# Altium PCB power.PcbDoc
Units mil, origin at the board's own origin, x right, y up, seen from the top; angles counter-clockwise.
Board outline 1000 x 2460.63 mil, 4 copper layers (Top Layer, GND, POWER, Bottom Layer), stack 23.756 mil thick; 73 components, 33 nets, 289 pads, 253 vias.
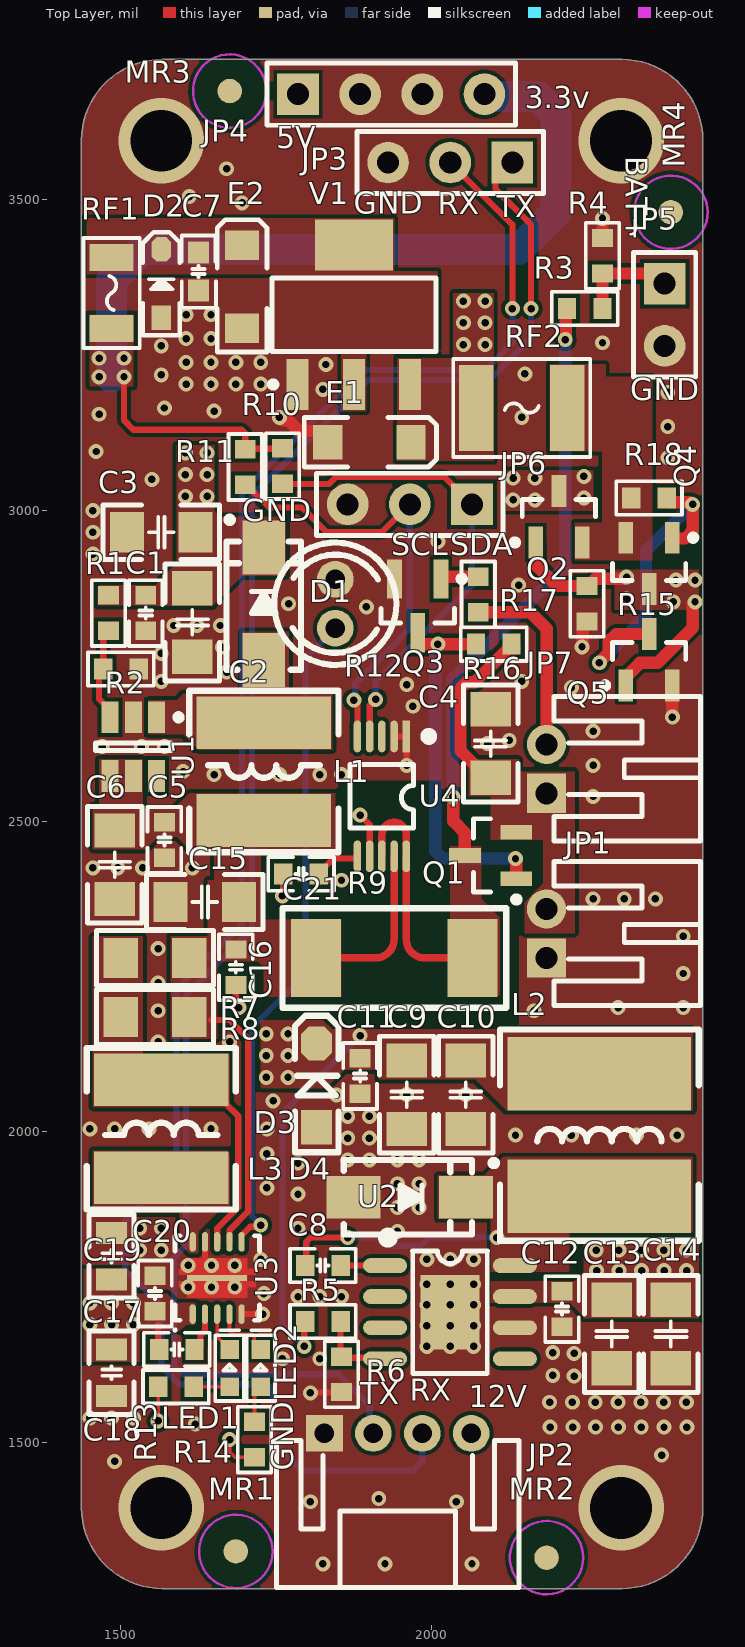
[diagram p0: Top Layer view]
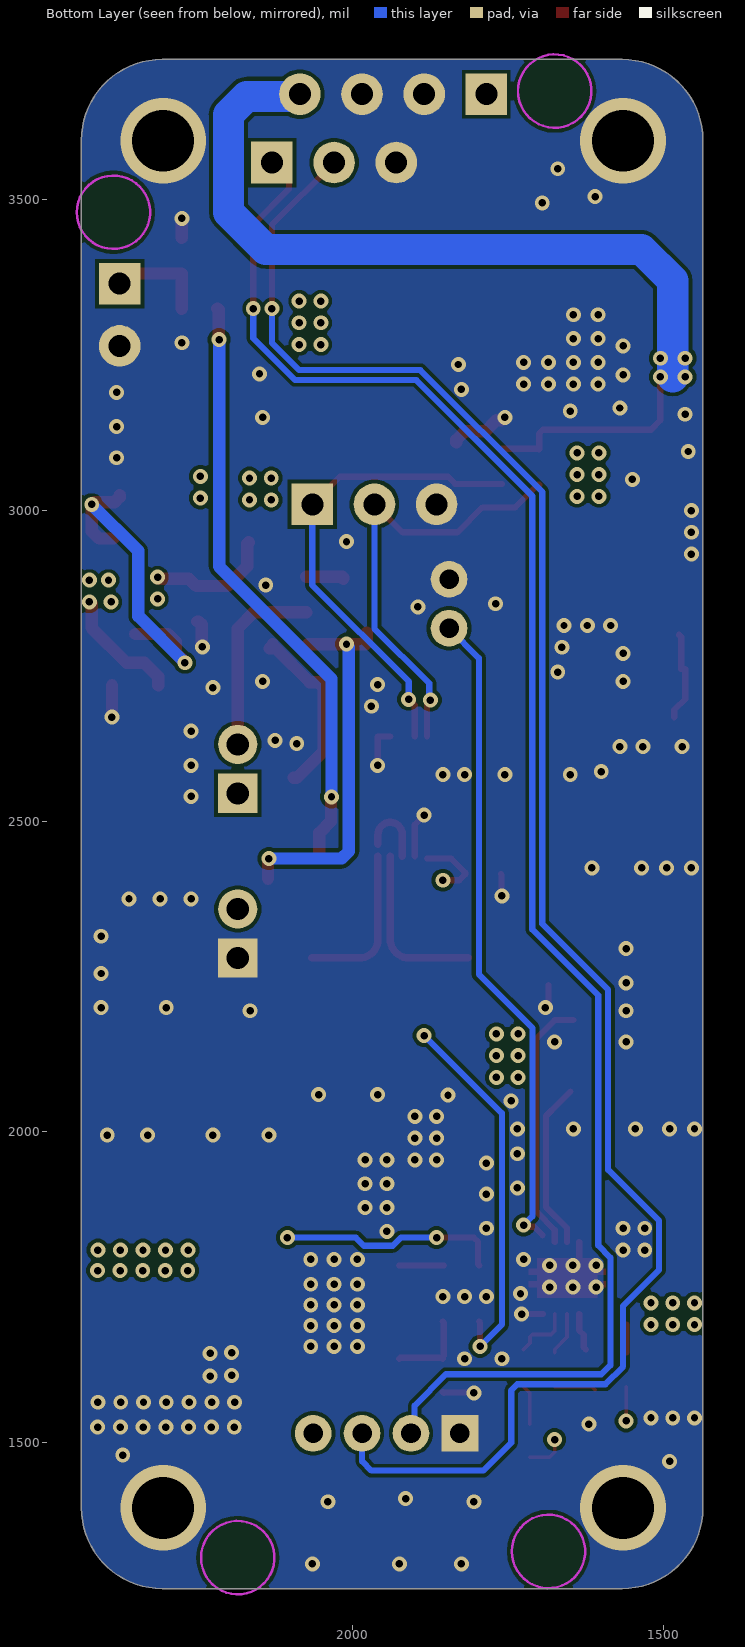
[diagram p1: Bottom Layer view, seen from below]
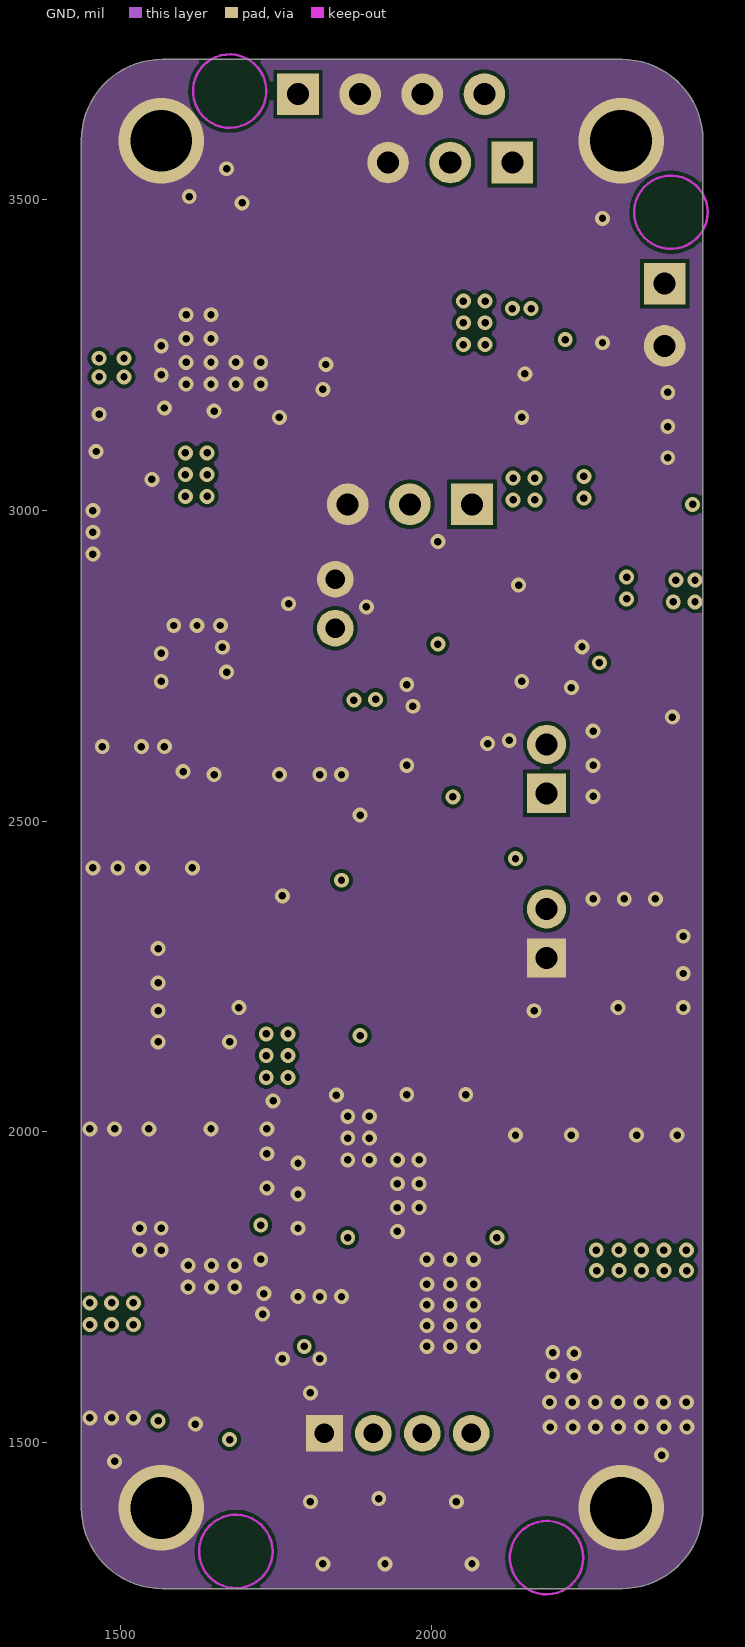
[diagram p2: GND]
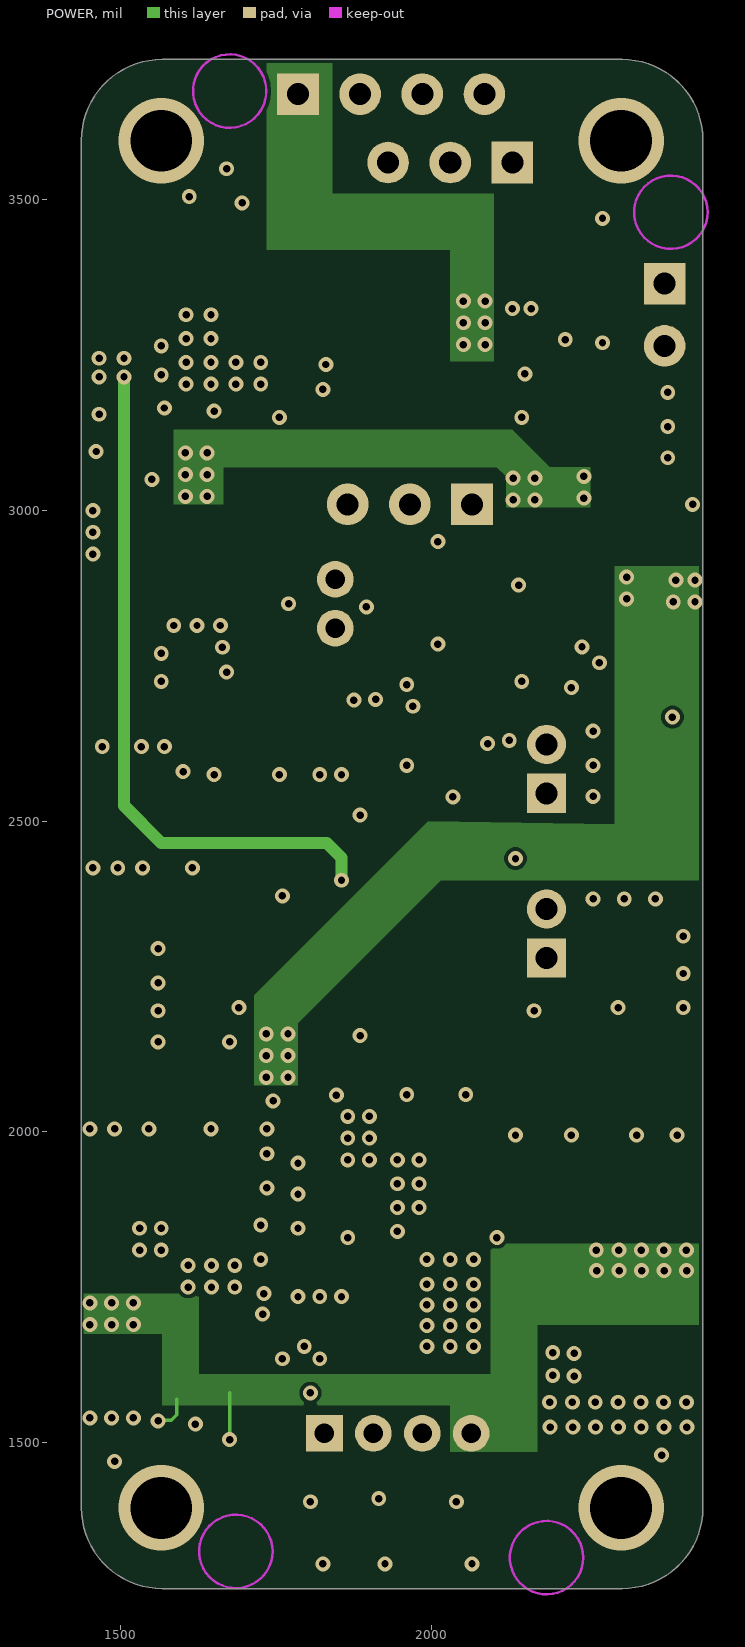
[diagram p3: POWER]

## Layer stack, top to bottom
Top Solder: solder mask 0.4, Solder Resist, Dk 3.5
Top Layer: signal copper 1.4
Dielectric 2: prepreg 2.8, PP-006, Dk 4.1
GND: signal copper 1.378
Dielectric 1: dielectric 12.6, FR-4, Dk 4.8
POWER: signal copper 1.378
Dielectric 3: prepreg 2.8, PP-006, Dk 4.1
Bottom Layer: signal copper 1.4
Bottom Solder: solder mask 0.4, Solder Resist, Dk 3.5

## Board outline
1436.53,1395.17 ccw(c1566.45,1395.17) 1566.45,1265.25 2306.61,1265.25 ccw(c2306.61,1395.17) 2436.53,1395.17 2436.53,3595.96 ccw(c2306.61,3595.96) 2306.61,3725.88 1566.45,3725.88 ccw(c1566.45,3595.96) 1436.53,3595.96

## Design rules (kind name [scope] priority, off if disabled: settings)
AcuteAngle [All] p1: minimum=4.50000000000000E+0001 checktracksonly=FALSE
BoardOutlineClearance [All] p1: gap=0 ignorepadtopadclearanceinfootprint=FALSE
Clearance [All] p1: gap=6 ignorepadtopadclearanceinfootprint=FALSE
DiffPairsRouting [All] p1: maxlimit=10 minlimit=6 mostfreqgap=10 toplayer_minwidth=6 toplayer_maxwidth=15 toplayer_prefwidth=10 midlayer1_minwidth=6 midlayer1_maxwidth=15 midlayer1_prefwidth=10 midlayer2_minwidth=6 midlayer2_maxwidth=15 midlayer2_prefwidth=10 bottomlayer_minwidth=6 bottomlayer_maxwidth=15 bottomlayer_prefwidth=10 maxuncoupledlength=500
Length [All] p1: maxlimit=100000 minlimit=0
MatchedLengths DiffPair_MatchedLengths [InDifferentialPair ('D')] p1: tolerance=5 checknetsindiffpair=FALSE checkdiffpairvsdiffpair=TRUE checkxsignals=TRUE checkothers=TRUE
MinimumAnnularRing [All] p1: minimumring=4
MinimumSolderMaskSliver [All] p1: minsoldermaskwidth=3.2
ParallelSegment [All] p1: limit=10000 gap=10
PlaneClearance [All] p1: clearance=10
PlaneConnect [All] p1: planeconnectstyle=Direct reliefexpansion=20 reliefentries=4 reliefconductorwidth=10 reliefairgap=10
PolygonConnect [All] p1: connectstyle=Direct reliefconductorwidth=10 reliefentries=4 polygonreliefangle="90 Angle" airgapwidth=10
RoutingVias [All] p1: holewidth=12 width=20 viastyle="Through Hole" minholewidth=6 minwidth=10 maxholewidth=100 maxwidth=100
SilkToSilkClearance [All] p1: silktosilkclearance=0
SilkToSolderMaskClearance [IsPad] p1: minsilkscreentomaskgap=0 clearancetoexposedcopper=TRUE
SolderMaskExpansion [All] p1: expansion=0 istentingtop=FALSE
StubLength [All] p1: limit=1000
UnRoutedNet [All] p1: checkbadconnections=TRUE
ViasUnderSMD [All] p1: allowed=TRUE
Width POWER [InNetClass('PWR')] p1: maxlimit=200 minlimit=6 preferedwidth=30
Width singal [All] p2: maxlimit=32 minlimit=4 preferedwidth=10
23 further rules are at their usual default settings.

## Classes and differential pairs
net class PWR: VCC3_3 VCC3_6 VCC5 VCC5_from_bat VCC5_from_vcc12 VCC12
component class power: C1 C2 C3 C4 C5 C6 C7 C8 C9 C10 C11 C12 C13 C14 D1 D2 D3 D4 E1 E2 JP1 JP2 JP3 JP4 JP5 L1 L2 R1 R2 R3 R4 R5 R6 RF1 U1 U2 V1
component class power2: C15 C16 C17 C18 C19 C20 C21 JP6 JP7 L3 LED1 LED2 MR1 MR2 MR3 MR4 Q1 Q2 Q3 Q4 Q5 R7 R8 R9 R10 R11 R12 R13 R14 R15 R16 R17 R18 RF2 U3 U4

## Components (designator, comment, footprint, x,y, rotation, side; value= is the part's Value field where it differs from the comment)
C1 "100nf" C0603_L 1540,2835 r90 top
C2 "100uf/6.3V" C1206_L 1615,2820 r90 top
C3 "100uf/6.3V" C1206_L 1565,2965 r0 top
C4 "100uf/6.3V" C1206_L 2095,2625 r90 top
C5 "100nf" C0603_L 1570,2470 r90 top
C6 "22uf/25V" C1206_L 1490,2430 r90 top
C7 "4.7uf" C0603_M 1625,3384.49 r270 top
C8 "10nf" C0603_L 1825,1785 r180 top
C9 "100uf/6.3v" C1206_L 1960,2060 r90 top
C10 "100uf/6.3v" C1206_L 2055,2060 r90 top
C11 "100nf" C0603_L 1885,2090 r90 top
C12 "100nf" C0603_L 2210,1715 r90 top
C13 "22uf/25v" C1206_L 2290,1674.88 r90 top
C14 "22uf/25v" C1206_L 2385,1674.88 r90 top
C15 "100uf/6.3V" C1206_L 1635,2370 r0 top
C16 "100nf" C0603_L 1685,2265 r90 top
C17 "100nf" C0603_L 1590,1650 r180 top
C18 "22uf/25v" C0805_L 1485,1612.6 r90 top
C19 "22uf/25v" C0805_L 1485,1800 r270 top
C20 "100nf" C0603_L 1555,1740 r90 top
C21 "100nf" C0603_L 1790,2415 r0 top
D1 "B340A-13-F" SMA 1730,2850 r90 top
D2 "UDD32C03L01" SOD-323 1565,3365 r90 top
D3 "SMF5.0A" SOD-123 1815,2075 r90 top
D4 "B340A-13-F" SMA 1965,1895 r0 top
E1 "10uF/10V" C_3216 1900,3110 r180 top
E2 "22uF/10V" C_3216 1695,3360 r270 top
JP1 "HDR-1X2" PH2.0-W-2P 2185,2319.37 r90 top
JP2 "HDR-1X4" PH2.0-W-4P 1945.63,1515 r0 top
JP3 "HDR-1X3" HDR2.54-LI-3P 2030,3560 r180 top
JP4 "HDR-1X4" HDR2.54-LI-4P 1935,3670 r0 top
JP5 "HDR-1X2" HDR2.54-LI-2P 2375,3315 r270 top
JP6 "HDR-1X3" HDR2.54-LI-3P 1965,3010 r180 top
JP7 "HDR-1X2" PH2.0-W-2P 2185,2584.37 r90 top
L1 "4.7uH" CD53 1730,2580 r270 top
L2 "15uH" CD75 2270,1995 r90 top
L3 "4.7uH" CD53 1565,2005 r90 top
LED1 "红色" LED0603_Y 1675,1620 r90 top
LED2 "绿色" LED0603_Y 1725,1620 r90 top
MR1 "MARK1.6" "Mark 1" 1685,1325 r0 top
MR2 "MARK1.6" "Mark 1" 2185,1315 r0 top
MR3 "MARK1.6" "Mark 1" 1675,3675 r0 top
MR4 "MARK1.6" "Mark 1" 2385,3480 r0 top
Q1 "AO3401" SOT23-3N 2095,2445 r90 top
Q2 "AO3401" SOT23-3N 2205,2990 r0 top
Q3 "S8050" SOT23-3M 1977.6,2846.69 r180 top
Q4 "AO3401" SOT23-3N 2350,2915 r180 top
Q5 "AO3400" SOT23-3N 2350,2760 r0 top
R1 "110K" R0603_L 1480,2835 r90 top
R2 "15K" R0603_L 1500,2745 r180 top
R3 "10K/0.1%" R0603_L 2246.46,3325 r180 top
R4 "10K/0.1%" R0603_L 2275,3410 r270 top
R5 "10k" R0603_L 1825,1695 r180 top
R6 "3.24k" R0603_L 1855,1610 r90 top
R7 "0.05R" R1206_L 1555,2280 r0 top
R8 "0.1R" R1206_L 1555,2185 r0 top
R9 "0.002R" R2512_M 1940,2280 r180 top
R10 "4.7K" R0603_L 1760,3071.46 r90 top
R11 "4.7K" R0603_L 1700,3070 r90 top
R12 "471K" PK0406 1845,2850 r270 top
R13 "1K" R0603_L 1588.54,1590 r0 top
R14 "1K" R0603_L 1715,1505 r90 top
R15 "330K" R0603_L 2250,2850 r270 top
R16 "40K" R0603_L 2100,2785 r0 top
R17 "10K" R0603_L 2075,2865 r90 top
R18 "330K" R0603_L 2350,3020 r180 top
RF1 "BSMD1206-100-24V" F1206 1485,3350 r90 top
RF2 "SMD1812-300C-16V" F1812 2145,3165 r0 top
U1 "MT3608L" SOT23-6M 1520,2620 r270 top
U2 "TPS5430DDAR" SOIC-8_EP 2029.61,1710 r0 top
U3 "SLM6305" DFN10-L3.0-W3.0-P0.5_EP 1655,1765 r90 top
U4 "INA226AIDGSR" MSOP10_N 1920,2540 r180 top
V1 "AMS1117-3V3" SOT223_L 1875,3315 r0 top

## Footprints (in the part's own frame and the unit in brackets; to place one, negate y for a bottom-side part, rotate by r counter-clockwise, add the part's x,y. Pads: shape width x height; smd on the part's side, far side on the other; paste and mask are expansions set on the pad)
C0603_L [mm] "贴片MLCC电容"
  rect 0.75x0.85 smd: 1(-0.725,0) 2(0.725,0)
  silkscreen extent -1.35,-0.69 1.35,0.69, body extent -0.8,-0.4 0.8,0.4, height 0.8
C0603_M [mm] "贴片MLCC电容"
  rect 0.9x0.85 smd: 1(-0.775,0) 2(0.775,0)
  silkscreen extent -1.48,-0.69 1.48,0.71, body extent -0.8,-0.4 0.8,0.4, height 0.8
C0805_L [mil] "贴片MLCC电容"
  rect 35x50 smd: 1(-37.4,0) 2(37.4,0)
  silkscreen extent -67,-36 67,36, body extent -39,-26 39,26, height 51
C1206_L [mm] "贴片MLCC电容"
  rect 1.4x1.65 smd: 1(-1.4,0) 2(1.4,0)
  silkscreen extent -2.39,-1.12 2.39,1.12, body extent -1.6,-0.8 1.6,0.8, height 1.1
C_3216 [mm] "长3.2mm，宽1.6mm，厚1.6mm"
  rect 1.2x1.4 smd: 1(-1.7,0) 2(1.7,0)
  silkscreen extent -2.74,-1.02 2.67,1.02, body extent -1.6,-0.8 1.6,0.8, height 1.63
CD53 [mm] "5.8*5.2*3.5mm（长宽高）        淘宝ID:黄晶宝石"
  rect 2.15x5.5 smd: 1(-2,0) 2(2,0)
  silkscreen extent -3.3,-3.05 3.3,3.05, body extent -2.87,-2.5 2.87,2.5, height 3.6
CD75 [mm] "7.8*7*5mm（长宽高）                     联系卖家 免费人工查找封装"
  rect 3x7.5 smd: 1(-2.5,0) 2(2.5,0)
  silkscreen extent -4.32,-4.06 4.32,4.06, body extent -3.85,-3.5 3.85,3.5, height 5.15
DFN10-L3.0-W3.0-P0.5_EP [mm] "DFN, 10-Leads, Body 3x3mm, Pitch 0.5mm, Thermal Pad 2.45x1.6mm               联系卖家 免费查找封装"
  oval 0.8x0.25 smd: 1(-1.475,1) 2(-1.475,0.5) 3(-1.475,0) 4(-1.475,-0.5) 5(-1.475,-1) 6(1.475,-1) 7(1.475,-0.5) 8(1.475,0) 9(1.475,0.5) 10(1.475,1)
  rect 0.25x2.45 smd paste+0 mask+0: 11(0,0)
  Top Layer region: -0.8,-1.225 -0.375,-1.225 -0.375,-1.575 -0.125,-1.575 -0.125,-1.225 0.125,-1.225 0.125,-1.575 0.375,-1.575 0.375,-1.225 0.8,-1.225 0.8,1.225 0.375,1.225 0.375,1.575 0.125,1.575 0.125,1.225 -0.125,1.225 -0.125,1.575 -0.375,1.575 -0.375,1.225 -0.8,1.225
  silkscreen extent -2.17,-1.73 1.73,1.77, body extent -1.56,-1.55 1.56,1.55, height 0.8
F1206 [mm] "1206贴片自恢复保险丝(PPTC)   联系卖家 免费查找封装"
  rect 1.1x1.8 smd: 1(-1.445,0) 2(1.445,0)
  silkscreen extent -2.25,-1.15 2.25,1.15, body extent -1.6,-0.85 1.6,0.85, height 0.61
F1812 [mil] "1812贴片自恢复保险丝(PPTC)"
  rect 55.38x137.76 smd: 1(-72.97,0) 2(72.97,0)
  silkscreen extent -110,-79 110,79, body extent -89,-63 89,63, height 41
HDR2.54-LI-2P [mm] "排针，2脚                         联系卖家 免费查找封装"
  rect 1.7x1.7 hole 0.9: 1(-1.27,0)
  round 1.7 hole 0.9: 2(1.27,0)
  silkscreen extent -2.54,-1.27 2.54,1.27, body extent -2.54,-1.27 2.54,1.27, height 2.54
HDR2.54-LI-3P [mm] "排针，3脚                        联系卖家 免费查找封装"
  rect 1.7x1.7 hole 0.9: 1(-2.54,0)
  round 1.7 hole 0.9: 2(0,0) 3(2.54,0)
  silkscreen extent -3.81,-1.27 3.81,1.27, body extent -3.81,-1.27 3.81,1.27, height 2.54
HDR2.54-LI-4P [mm] "排针，4脚"
  rect 1.7x1.7 hole 0.9: 1(-3.81,0)
  round 1.7 hole 0.9: 2(-1.27,0) 3(1.27,0) 4(3.81,0)
  silkscreen extent -5.08,-1.27 5.08,1.27, body extent -5.08,-1.27 5.08,1.27, height 2.54
LED0603_Y [mil] "黄色0603LED"
  rect 30x30 smd: 1(-30,0) 2(30,0)
  silkscreen extent -53,-23 61,23, body extent -31,-16 31,16, height 18
"Mark 1" [mm] "光学定位点，直径1mm"
  round 1 smd paste-1 mask+0.7: Mark(0,0)
  Keep-Out Layer circle w0.1: c0,0 r1.5
MSOP10_N [mm] "塑封体长3mm，宽3mm，脚距0.5MM   淘宝ID:黄晶宝石"
  rect 0.305x1.3 smd: 1(-1,-2.45)
  oval 0.305x1.3 smd: 2(-0.5,-2.45) 3(0,-2.45) 4(0.5,-2.45) 5(1,-2.45) 6(1,2.45) 7(0.5,2.45) 8(0,2.45) 9(-0.5,2.45) 10(-1,2.45)
  silkscreen extent -2.07,-2.6 1.3,1.3, body extent -1.5,-2.45 1.5,2.45, height 0.95
PH2.0-W-2P [mm] "长：5.9mm，宽：6mm，高：4.7mm"
  rect 1.6x1.6 hole 0.9: 1(-1,0)
  round 1.6 hole 0.9: 2(1,0)
  silkscreen extent -2.95,-6.3 2.95,-0.3, body extent -2.95,-6.3 2.95,0.3, height 4.75
PH2.0-W-4P [mm] "长：9.9mm，宽：6mm，高：4.7mm"
  rect 1.5x1.5 hole 0.8: 1(-3,0)
  round 1.5 hole 0.8: 2(-1,0) 3(1,0) 4(3,0)
  silkscreen extent -4.95,-6.3 4.95,-0.3, body extent -4.95,-6.3 4.95,0.3, height 4.75
PK0406 [mm] "2*5*8mm(脚距，直径，高）"
  round 1.5 hole 0.8: 1(-1,0) 2(1,0)
  silkscreen extent -2.5,-2.5 2.5,2.5, body extent -2.5,-2.5 2.5,2.5, height 8.02
R0603_L [mm] "1/10W贴片电阻"
  rect 0.75x0.85 smd: 1(-0.725,0) 2(0.725,0)
  silkscreen extent -1.35,-0.69 1.35,0.69, body extent -0.8,-0.4 0.8,0.4, height 0.4
R1206_L [mm] "1/4W贴片电阻"
  rect 1.4x1.65 smd: 1(-1.4,0) 2(1.4,0)
  silkscreen extent -2.39,-1.12 2.39,1.12, body extent -1.6,-0.8 1.6,0.8, height 0.56
R2512_M [mm] "1W贴片电阻                       联系卖家 免费人工查找封装"
  rect 2.032x3.2 smd: 1(-3.2,0) 2(3.2,0)
  silkscreen extent -4.57,-2.03 4.57,2.03, body extent -3.2,-1.6 3.2,1.6, height 0.56
SMA [mm] "4.5x2.6*2.2mm（长宽高，不包括引脚）联系卖家 免费查找封装"
  rect 2.2x1.75 smd: 1(-2.3,0) 2(2.3,0)
  silkscreen extent -2.7,-1.52 3.56,1.52, body extent -2.55,-1.3 2.55,1.3, height 2.15
SOD-123 [mil] "2.7x1.6X1.1mm（长宽高，不包括引脚） 联系卖家 免费人工查找封装"
  rect 55x50 smd: 1(-67.5,0)
  oct 55x50 smd: 2(67.5,0)
  silkscreen extent -108,-35 112,35, body extent -73,-32 73,31, height 50
SOD-323 [mm] "1.8x1.3X0.9mm（长宽高，不包括引脚）联系卖家 免费人工查找封装"
  rect 1x0.8 smd: 1(-1.4,0)
  oct 1x0.8 smd: 2(1.4,0)
  silkscreen extent -2.11,-0.76 2.11,0.76, body extent -1.32,-0.65 1.32,0.65, height 0.95
SOIC-8_EP [mm] "5*6*1.8mm（长宽高)         联系卖家 免费查找封装"
  oval 1.8x0.61 smd: 1(-2.65,1.905) 2(-2.65,0.635) 3(-2.65,-0.635) 4(-2.65,-1.905) 5(2.65,-1.905) 6(2.65,-0.635) 7(2.65,0.635) 8(2.65,1.905)
  rect 2.413x3.048 smd paste-2: 9(0,0)
  rect 0.9x0.7 on Top Paste: 10(-0.625,-1.1) 10(-0.625,0) 10(-0.625,1.1) 11(0.65,-1.1) 11(0.65,0) 11(0.65,1.1)
  silkscreen extent -2.69,-2.5 1.52,3.2, body extent -3,-2.5 3,2.5, height 1.53
SOT23-3M [mm] "SOT23, 3-Leads, Body 2.9x1.3mm, Pitch 0.95mm, Lead Span 2.4mm, IPC Low Density 联系卖家 获取最新版本"
  rect 0.6x1.6 smd: 1(-0.95,-1.1) 2(0.95,-1.1) 3(0,1.1)
  silkscreen extent -1.93,-1.22 1.5,0.7, body extent -1.5,-1.2 1.5,1.2, height 1.05
SOT23-3N [mm] "SOT23, 3-Leads, Body 2.9x1.3mm, Pitch 0.95mm, Lead Span 2.4mm, IPC Medium Density  联系卖家  获取最新版本"
  rect 0.6x1.3 smd: 1(-0.95,-1.05) 2(0.95,-1.05) 3(0,1.05)
  silkscreen extent -1.92,-1.18 1.5,0.7, body extent -1.5,-1.2 1.5,1.2, height 1.05
SOT23-6M [mm] "SOT-23, 6-Leads, Body 2.90x1.60mm, Pitch 0.95mm, IPC Low Density"
  rect 1.3x0.7 smd: 1(-1.2,0.95) 2(-1.2,0) 3(-1.2,-0.95) 4(1.2,-0.95) 5(1.2,0) 6(1.2,0.95)
  silkscreen extent -1.32,-1.55 0.15,1.98, body extent -1.4,-1.5 1.4,1.5, height 1.15
SOT223_L [mm] "SOT223, 4-Leads, Body 6.5x3.5mm, Pitch 2.3mm, Lead Span 7mm, IPC High Density"
  rect 0.9x2.1 smd: 1(-2.3,-2.85) 2(0,-2.85) 3(2.3,-2.85)
  rect 3.2x2.1 smd: 4(0,2.85)
  silkscreen extent -3.42,-2.97 3.35,1.5, body extent -3.25,-3.51 3.25,3.51, height 1.65

## Part data
C1 C5 C6 C7 C8 C11 C12 C13 C16 C17 C20 C21: library part C, "贴片电容/MLCC电容", BOM名称=无极性贴片电容
  C7 C8 C11 C12 C13 C16 C17 C20 C21: 联系下单店铺卖家 免费帮你查找封装="联系下单店铺卖家 免费技术指导"
C2 C3 C4: library part C, "贴片电容/MLCC电容", jlc_id=C15008, BOM名称=无极性贴片电容
C9 C10: library part C, "贴片电容/MLCC电容 C15008", BOM名称=无极性贴片电容, 联系下单店铺卖家 免费帮你查找封装="联系下单店铺卖家 免费技术指导"
C14: library part C, "贴片电容/MLCC电容 C12891", BOM名称=无极性贴片电容, 联系下单店铺卖家 免费帮你查找封装="联系下单店铺卖家 免费技术指导"
C15 C18 C19: library part C, "贴片电容/MLCC电容", jlc_id=C45783, BOM名称=无极性贴片电容, 联系下单店铺卖家 免费帮你查找封装="联系下单店铺卖家 免费技术指导"
D1 D4: "肖特基二极管 C85098", BOM名称=肖特基二极管, 属性=60V/5A
  D4: 当前库版本V2024.3.30 @淘宝卖家:黄晶宝石=最新版本发布https://item.taobao.com/item.htm?id=566775463719
D2: library part TVS, "TVS通用 C78439", 当前库版本V2024.3.30 @淘宝卖家:黄晶宝石=最新版本发布https://item.taobao.com/item.htm?id=566775463719
D3: library part TVS, "TVS通用", 当前库版本V2024.3.30 @淘宝卖家:黄晶宝石=最新版本发布https://item.taobao.com/item.htm?id=566775463719
E1: library part CT, "贴片钽电容 C7171", BOM名称=贴片钽电容, 联系下单店铺卖家 免费帮你查找封装="联系下单店铺卖家 免费技术指导"
E2: library part CT, "贴片钽电容  C11366", BOM名称=贴片钽电容, 联系下单店铺卖家 免费帮你查找封装="联系下单店铺卖家 免费技术指导"
JP1 JP5 JP7: library part "Header 2", "2P接插件", BOM名称=2P接插件
  JP1 JP7: 封装库来自淘宝卖家：黄晶宝石=获取最新版本https://shop463601444.taobao.com, 联系下单店铺卖家 免费帮你查找封装="联系下单店铺卖家 免费技术支持"
  JP5: 封装库来自淘宝卖家ID：黄晶宝石=其他店铺购入均为盗版封装库，请立即申请退款，本店现金奖励50~200元, 联系卖家，免费查找封装=唯一出售店铺网址https://shop463601444.taobao.com
JP2 JP4: library part "Header 4", "4P接插件"
  JP2: 封装库来自淘宝卖家：黄晶宝石=获取最新版本https://shop463601444.taobao.com, 联系下单店铺卖家 免费帮你查找封装="联系下单店铺卖家 免费技术支持"
  JP4: BOM名称=4P接插件, 封装库来自淘宝卖家ID：黄晶宝石=其他店铺购入均为盗版封装库，请立即申请退款，本店现金奖励50~200元, 联系卖家，免费查找封装=唯一出售店铺网址https://shop463601444.taobao.com
JP3 JP6: library part "Header 3", "3P接插件", BOM名称=3P接插件, 封装库来自淘宝卖家ID：黄晶宝石=其他店铺购入均为盗版封装库，请立即申请退款，本店现金奖励50~200元, 联系卖家，免费查找封装=唯一出售店铺网址https://shop463601444.taobao.com
L1 L3: library part L-SMD, "CD系列贴片线绕功率电感", jlc_id=C177246, BOM名称=功率电感
L2: library part L-SMD, "CD系列贴片线绕功率电感", jlc_id=C177243, BOM名称=功率电感
LED1 LED2: library part LED, "贴片LED", BOM名称=贴片LED, 封装库来自淘宝卖家：黄晶宝石=其他店铺购入均为盗版封装库，无更新权益，请立即申请退款，本店现金奖励200~1000元
MR1 MR2 MR3 MR4: library part MARK, "光学定位点", BOM名称=光学定位点, 联系下单店铺卖家 免费技术支持="联系下单店铺卖家 免费帮你查找封装"
Q1 Q2 Q4: "P沟道 30V/4.2A", jlc_id=C347476, BOM名称=场效应管, 参数="P沟道 30V/4.2A", 当前库版本V2024.2.3 @淘宝卖家:黄晶宝石=最新版本发布https://item.taobao.com/item.htm?id=566775463719, 联系下单店铺卖家 免费帮你查找封装="联系下单店铺卖家 免费技术支持"
Q3: library part BCP68, "NPN三极管", 当前库版本V2024.2.3 @淘宝卖家:黄晶宝石=最新版本发布https://item.taobao.com/item.htm?id=566775463719, 联系下单店铺卖家 免费帮你查找封装="联系下单店铺卖家 免费技术支持"
Q5: "N沟道 30V/4.2A", jlc_id=C20917, BOM名称=场效应管, 参数="N沟道 30V/4.2A", 当前库版本V2024.2.3 @淘宝卖家:黄晶宝石=最新版本发布https://item.taobao.com/item.htm?id=566775463719, 联系下单店铺卖家 免费帮你查找封装="联系下单店铺卖家 免费技术支持"
R1 R2 R3 R4 R5 R6 R10 R11 R13 R14 R15 R16 R17 R18: library part R, "贴片电阻", BOM名称=贴片电阻, 联系下单店铺卖家 免费帮你查找封装="联系下单店铺卖家 免费技术指导"
R7: library part R, "贴片电阻", jlc_id=C127691, BOM名称=贴片电阻, 联系下单店铺卖家 免费帮你查找封装="联系下单店铺卖家 免费技术指导"
R8: library part R, "贴片电阻", jlc_id=C25334, BOM名称=贴片电阻, 联系下单店铺卖家 免费帮你查找封装="联系下单店铺卖家 免费技术指导"
R9: library part R, "贴片电阻", jlc_id=C2994640, BOM名称=贴片电阻, 联系下单店铺卖家 免费帮你查找封装="联系下单店铺卖家 免费技术指导"
R12: library part RT, "热敏电阻", BOM名称=压敏电阻, 当前库版本V2024.3.30 @淘宝卖家:黄晶宝石=最新版本发布https://item.taobao.com/item.htm?id=566775463719
RF1: library part FUSE-PPTC, "PPTC自恢复保险丝 C910830", BOM名称=PPTC自恢复保险丝, 当前库版本V2024.3.30 @淘宝卖家:黄晶宝石=最新版本发布https://item.taobao.com/item.htm?id=566775463719
RF2: library part FUSE-PPTC, "PPTC自恢复保险丝", jlc_id=C2760295, BOM名称=PPTC自恢复保险丝, 当前库版本V2024.3.30 @淘宝卖家:黄晶宝石=最新版本发布https://item.taobao.com/item.htm?id=566775463719
U1: "Boost升压DC-DC芯片 2-28V"
U2: "5.5v到36v转1.3v到32v"
U3: "1锂电池充电ic 2.5a 4.2v 4V~26V输入", Charging Saturation Voltage=4.2V, jlc_id=C711584, JLCPCB Part Class=扩展库, LCSC Part Name=宽输入电压2.5A单节锂电池充电管理IC, Manufacturer=无锡松朗微, Maximum Charge Current=2.5A, Operating Temperature=-40℃~+85℃, Supply Voltage=4V~26V, Add into BOM=yes, Convert to PCB=yes, Datasheet=https://atta.szlcsc.com/upload/public/pdf/source/20200723/C711584_2224278DBAF55B7B34A102BEBD70C238.pdf, Device=SLM6305, Manufacturer Part=SLM6305, Number of Cells=1, Supplier=LCSC, Supplier Footprint=TDFN-10-EP(3x3), Symbol=SLM6305, The Chip Type=降压充电芯片, Type of Battery=锂离子/聚合物
U4: library part INA226, "双向电流/功率监视器芯片", 封装库来自淘宝卖家：黄晶宝石="其他店铺购入均为盗版封装库，无更新权益，请立即申请退款，联系卖家：黄晶宝石 获取现金奖励200~5000元"
V1: library part AMS1117, "三端稳压芯片", BOM名称=稳压芯片, 当前库版本V2024.3.30 @淘宝卖家:黄晶宝石=最新版本发布https://item.taobao.com/item.htm?id=566775463719, 联系下单店铺卖家 免费帮你查找封装="联系下单店铺卖家 免费技术支持"

## Free pads (board coordinates)
  round 0.25 on Mech6: 1(1436.53,1395.17) 1(1436.53,1395.17) 1(1436.53,3595.96) 1(1436.53,3595.96) 1(1517.24,1395.17) 1(1517.24,3595.96) 1(1566.45,1265.25) 1(1566.45,1265.25) 1(1566.45,3725.88) 1(1566.45,3725.88) 1(1615.66,1395.17) 1(1615.66,3595.96) 1(2257.39,1395.17) 1(2257.39,3595.96) 1(2306.61,1265.25) 1(2306.61,1265.25) 1(2306.61,3725.88) 1(2306.61,3725.88) 1(2355.82,1395.17) 1(2355.82,3595.96) 1(2436.53,1395.17) 1(2436.53,1395.17) 1(2436.53,3595.96) 1(2436.53,3595.96)
  round 3.94 on Mech6: 1(1441.28,2550) 1(1441.28,2550) 1(1441.28,2950) 1(1441.28,2950) 1(1441.28,2960) 1(1441.28,2960) 1(1441.28,3060) 1(1441.28,3060) 1(1541.28,2550) 1(1541.28,2550) 1(1541.28,2950) 1(1541.28,2950) 1(1736.28,3620) 1(1736.28,3620) 1(1736.28,3720) 1(1736.28,3720) 1(1741.28,2960) 1(1741.28,2960) 1(1741.28,3060) 1(1741.28,3060) 1(1816.28,2960) 1(1816.28,2960) 1(1816.28,3060) 1(1816.28,3060) 1(1881.28,3510) 1(1881.28,3510) 1(1881.28,3610) 1(1881.28,3610) 1(2116.28,2960) 1(2116.28,2960) 1(2116.28,3060) 1(2116.28,3060) 1(2136.28,3620) 1(2136.28,3620) 1(2136.28,3720) 1(2136.28,3720) 1(2181.28,3510) 1(2181.28,3510) 1(2181.28,3610) 1(2181.28,3610) 1(2287.69,3391.22) 1(2326.28,3215) 1(2326.28,3215) 1(2326.28,3415) 1(2326.28,3415) 1(2426.28,3215) 1(2426.28,3215) 1(2426.28,3415) 1(2426.28,3415)
  round 5 on Mech6: 1(1444.82,1569.96) 1(1444.82,1569.96) 1(1444.82,2215.63) 1(1444.82,2215.63)
  round 98.43 on Mech6: 1(1566.45,1395.17) 1(1566.45,3595.96) 1(2306.61,1395.17) 1(2306.61,3595.96)
  round 3 on Mech6: 1(1711.7,2287) 1(1711.7,2287) 1(1903.28,3502) 1(1903.28,3502) 1(2009.28,3502) 1(2009.28,3502) 1(2033.28,3502) 1(2033.28,3502) 1(2139.28,3502) 1(2139.28,3502) 1(2346.83,3067) 1(2346.83,3067) 1(2415.72,3067) 1(2415.73,3067)
  round 4 on Mech6: 1(1875.28,3516) 1(1875.28,3516) 1(1875.28,3604) 1(1875.28,3604) 1(2287.69,3391.22)

## Via types
v1: diameter 24, hole 12, Top Layer to Bottom Layer, tented both sides, 249 vias
v2: diameter 137.8, hole 99.61, Top Layer to Bottom Layer, 4 vias

## Nets (pads, with @x,y where several pads share a name; then routed paths per layer and width w, separated by ;. In a path a pad name is that pad's centre, name@x,y a point inside that pad or via, vN(x,y) a via of type N, cw(c..) or ccw(c..) an arc to the next point about the centre after c; other vN are vias at no path point)
BAT+: Q1.3 R3.2 R9.1 U4.8 U4.10 | length 1334
  Top Layer w12: U4.8 1920,2478.54 ; 1920,2478.59 cw(c1939.68,2478.65) 1959.37,2478.58 U4.10@1959.37,2463.13 ; U4.10 1959.37,2309.83 ccw(c1989.21,2309.83) 1989.21,2279.99 R9.1
  Top Layer w20: v1(2034.13,2539.13) 2034.89,2538.36 2034.89,2500.11 2053.66,2481.34 Q1.3 ; v1(2215,3275) 2215.77,3275.77 2215.77,3322.85 R3.2
  Bottom Layer w20: v1(2034.13,2539.13) 2034.13,2729.13 2215,2910 v1(2215,3275)
BAT_IN: C4.1 JP1.2 JP7.1 Q1.2 R16.2 | length 289.4
  Top Layer w20: C4.1 2090.08,2569.88 2046.52,2613.44 2046.52,2714.3 2055.89,2723.68 2069.19,2723.68 2123.78,2778.27 2133.31,2778.27 2128.54,2783.03 R16.2
GND: C1.1 C2.1 C3.1 C4.2 C5.1 C6.1 C7.2 C9.1 C10.1 C11.1 C12.1 C13.1 C14.1 C15.1 C16.1 C18.1 C19.1 C20.2 C21.1 D2.1 D3.1 D4.1 E1.2 E2.2 JP1.1 JP2.1 JP3.3 JP4.2 JP4.3 JP5.2 JP6.3 Q3.2 Q5.2 R2.1 R4.1 R6.1 R12.1 R15.2 U1.2 U2.6 U2.9 U3.5 U3.9 U3.11 U4.1 U4.2 U4.7 V1.1 | length 560.6
  Top Layer w10: v1@1635.31,1780.31 U3.9 ; C16.1 1685,2208.79 1690,2203.79 v1(1690,2200) ; U3.5 v1(1728.07,1706.93) ; v1(1760,2380) 1760.73,2380.73 1760.73,2414.27 C21.1 ; v1(1805,1580) 1805.73,1580.73 1852.81,1580.73 1853.54,1580 R6.1 ; v1@1890,2505 1900.32,2494.68 U4.7 ; U4.2 1958.54,2636.46 U4.1@1960,2635 ; U4.1@1959.37,2636 U4.1 1959.68,2636.14 1959.68,2590.32 v1(1960,2590)
  Top Layer w20: v1(1755,3150) 1755.56,3150 1760.1,3145.46 1768.67,3145.46 1786.56,3127.56 1819.45,3127.56 1833.07,3113.94 E1.2 ; v1(2242.04,2780.43) 2242.04,2781.51 2243.27,2782.74 2243.27,2816.69 2248.03,2821.46 R15.2 ; R4.1 v1(2275,3470) ; v1(2387.4,2667.6) Q5.2
  other v1: 1825,1305 1925,1305 2065,1305 1805,1405 2040,1405 1915,1410 1490,1470 2370,1480 2190.66,1524.98 2227.32,1524.98 2263.99,1524.98 2300.66,1524.98 2337.32,1524.98 2373.99,1524.98 2410.66,1524.98 1620,1530 1450,1540 1485,1540 1520,1540 2190,1565 2226.67,1565 2263.33,1565 2300,1565 2336.67,1565 2373.33,1565 2410,1565 2229.42,1607.13 2195,1608.33 1760,1635 1820,1635 2229.42,1643.8 2195,1645 1992.5,1655 2030,1655 2067.5,1655 1992.5,1688.33 2030,1688.33 2067.5,1688.33 1992.5,1721.67 2030,1721.67 2067.5,1721.67 1785,1735 1820,1735 1855,1735 1730,1740 1608.28,1750.32 1645.78,1750.32 1683.28,1750.32 1992.5,1755 2030,1755 2067.5,1755 1608.28,1785.32 1645.78,1785.32 1683.28,1785.32 1725,1795 1992.5,1795 2030,1795 2067.5,1795 1530,1810 1565,1810 1945,1840 1530,1845 1565,1845 1785,1845 1945,1878.33 1980,1878.33 1785,1900 1735,1910 1945,1916.67 1980,1916.67 1785,1950 1865,1955 1900,1955 1945,1955 1980,1955 1735,1965 1865,1990 1900,1990 2135,1995 2225,1995 2330,1995 2395,1995 1450,2005 1490,2005 1545,2005 1645,2005 1735,2005 1865,2025 1900,2025 1745,2050 1846.65,2059.4 1960,2060 2055,2060 1560,2145 1675,2145 1560,2195 2165,2195 2300,2200 2405,2200 1560,2240 2405,2255 1560,2295 2405,2315 2260,2375 2310,2375 2360,2375 1455,2425 1495,2425 1535,2425 1615,2425 1885,2510 2260,2540 1650,2575 1755,2575 1820,2575 1855,2575 1600,2580 2260,2590 1470,2620 1533,2620 1570,2620 2090,2625 2125,2630 2260,2645 1970,2685 2225,2715 1960,2720 1565,2725 2145,2725 1670,2740 1565,2770 1663.26,2780 1585,2815 1622.5,2815 1660,2815 1895,2845 1770,2850 2140,2880 1455,2930 2010,2950 1455,2965 1455,3000 1550,3050 2380,3085 1460,3095 2380,3135 2145,3150 1465,3155 1650,3160 1570,3165 2380,3190 1825,3195 1605,3203.33 1645,3203.33 1685,3203.33 1725,3203.33 1565,3218.33 2150,3220 1830,3235 1605,3238.33 1645,3238.33 1685,3238.33 1725,3238.33 1565,3265 2275,3270 1605,3276.67 1645,3276.67 1605,3315 1645,3315 1695,3495 1610,3505 1670,3550
  other v2: 1565,1395 2305,1395 1565,3595 2305,3595
NetC7_1: C7.1 D2.2 E2.1 RF1.2 V1.2 V1.4
NetC8_1: C8.1 U2.1 | length 71.5
  Top Layer w10: C8.1 U2.1@1925,1785
NetC8_2: C8.2 D4.2 L2.1 U2.8 | length 359.3
  Top Layer w10: C8.2 1798.23,1786.77 1798.23,1823.23 1805,1830 v1(1865,1830)
  Bottom Layer w10: v1(1865,1830) 1922.47,1830 1935.47,1817 1981.97,1817 1994.97,1830 v1(2105,1830)
NetC17_1: C17.1 U3.2 | length 61.2
  Top Layer w10: C17.1@1625,1650 1628.31,1653.31 1628.31,1673.31 1635.31,1680.31 U3.2
NetD1_1: D1.1 L1.1 U1.1
NetJP5_1: JP5.1 R3.1 R4.2 | length 163.3
  Top Layer w20: R3.1 R4.2 2358.54,3381.46 JP5.1
NetL3_1: L3.1 U3.10
NetL3_2: L3.2 R7.1 R8.1 U3.8 | length 272.3
  Top Layer w10: L3.2@1649.68,2065 1668.27,2046.42 1689,2025.68 1689,1879 1655.08,1845.08 1655.08,1823.15 U3.8
NetLED1_1: LED1.1 R13.2 | length 67.1
  Top Layer w6: R13.2@1610,1585 1615,1590 R13.2 LED1.1
NetLED1_2: LED1.2 U3.3 | length 70.2
  Top Layer w6: U3.3 1655,1670 LED1.2 LED1.2@1675,1645
NetLED2_1: LED2.1 R14.2 | length 64.1
  Top Layer w6: R14.2@1715,1530 R14.2 1715,1580 LED2.1
NetLED2_2: LED2.2 U3.4 | length 95.5
  Top Layer w6: U3.4 1674.68,1680.32 1681,1674 1711.24,1674 1714.76,1670.49 1714.76,1660.24 LED2.2
NetQ1_1: Q1.1 Q3.3 R16.1 | length 611.7
  Top Layer w20: Q3.3 1977.6,2786.81 1979.41,2785 v1(2010,2785) R16.1 ; v1(2135,2440) 2136.34,2438.66 Q1.1
  Bottom Layer w20: v1(2010,2785) 2010,2783.92 2006.13,2780.04 2006.13,2451.72 2017.84,2440 v1@2133.92,2440
NetQ2_2: Q2.2 Q4.2 R18.2 RF2.2
NetQ3_1: Q3.1 R17.2 | length 62.5
  Top Layer w20: Q3.1 2015,2891.73 2016.81,2893.54 R17.2
NetQ4_1: Q4.1 Q5.3 R18.1 | length 563.9
  Top Layer w20: v1(2270,2755) 2270,2756.08 2284.91,2770.99 2284.91,2789.05 2297.2,2801.34 Q5.3 ; R18.1@2375,3025 2375,3021.57 2383.31,3013.27 2415.65,3013.27 2418.92,3010 v1(2420,3010) 2420,2966.72 2408.28,2955 Q4.1@2385,2955
  Bottom Layer w20: v1(2270,2755) 2345,2830 2345,2935 v1(2420,3010)
NetR1_1: R1.1 R2.2 U1.3 | length 141.7
  Top Layer w10: R2.2@1465,2745 1465,2696.65 1482.6,2679.06 U1.3 ; R2.2 1471.46,2796.69 1474.76,2800 R1.1@1475,2800
NetR5_1: R5.1 R6.2 U2.4 | length 129.4
  Top Layer w10: R6.2@1855,1635 1856.77,1636.77 1923.5,1636.77 U2.4 ; R6.2 1853.54,1640 1853.54,1693.54 R5.1@1855,1695
NetR12_2: R12.2 U3.6 | length 1059.3
  Top Layer w10: U3.6@1694.45,1833.82 1707.95,1847.32 1722.32,1847.32 v1(1725,1850)
  Bottom Layer w10: v1(1725,1850) 1710.89,1864.11 1710.89,2167.42 1797,2253.54 1797,2762.63 R12.2
POWER_SW: JP7.2 R17.1 | length 307.2
  Top Layer w20: R17.1 2158.54,2836.46 2185,2810 JP7.2
SCL: JP6.2 R11.1 U4.5 | length 728.5
  Top Layer w10: R11.1 1701.97,3041.46 1738.43,3005 1791.19,3005 1831.19,2965 1920,2965 JP6.2 ; v1(1875,2695) 1880.63,2689.37 U4.5
  Bottom Layer w10: v1(1875,2695) 1877,2697 1877,2722 1965,2810 JP6.2
SDA: JP6.1 R10.1 U4.4 | length 770
  Top Layer w10: R10.1 1835.03,3042.91 1846.58,3054.46 2020.54,3054.46 JP6.1 ; U4.4 1900.31,2686.53 v1(1910,2696.21)
  Bottom Layer w10: v1(1910,2696.21) 1910,2725 2065,2880 JP6.1
UART3_RX: JP2.3 JP3.2 | length 2965.2
  Top Layer w10: JP3.2 2130,3460 v1(2130,3325)
  Bottom Layer w10: JP2.3 1985,1470 1970,1455 1790,1455 1745,1500 1745,1584.14 1735.14,1594 1593.37,1594 1565,1622.37 1565,1720 1507,1778 1507,1857 1589,1939 1589,2229 1695,2335 1695,3030 1891,3226 2086,3226 2130,3270 v1(2130,3325)
UART3_TX: JP2.2 JP3.1 | length 2711.8
  Top Layer w10: JP3.1 2102.61,3532.61 2102.61,3517.39 2160,3460 v1(2160,3325)
  Bottom Layer w10: JP2.2 1900.47,1520.79 1900.47,1559.53 1850,1610 1600,1610 1585.28,1624.72 1585.28,1797.76 1605,1817.47 1605,2220 1711,2326 1711,3023.37 1897.63,3210 2092.63,3210 2160,3277.37 v1(2160,3325)
VCC3_3: C21.2 JP4.4 R10.2 R11.2 RF1.1 U4.6 | length 2785.9
  Top Layer w10: v1(1505,3215) 1505,3145 1520,3130 1694.14,3130 1700,3124.14 R11.2 1700.73,3099.27 1759.27,3099.27 R10.2 ; v1(1855,2405) 1828.31,2405 1818.54,2414.76 1818.54,2416.97 1841.57,2440 U4.6@1880,2440
  POWER w20: v1(1505,3215) 1505,2525 1565,2465 1831.26,2465 1855,2441.26 v1(1855,2405)
  Bottom Layer w50: 1485,3215 1485,3370 1535,3420 2140,3420 2200,3480 2200,3637.25 2170.71,3666.54 2100.44,3666.54 2100.21,3666.76 2088.24,3666.76 JP4.4
  other v1: 1465,3215 1465,3245 1505,3245
VCC3_6: C5.2 C6.2 C15.2 C16.2 L1.2 R7.2 R8.2 R9.2 U1.4 U1.5 U3.7 U4.9 | length 688.1
  Top Layer w10: 1645,2180 1675,2180 1705,2150 1705,1872.37 1674.76,1842.14 1674.76,1823.15 U3.7
  Top Layer w12: R9.2 1909.37,2280 ccw(c1909.37,2310.31) 1939.69,2310.31 U4.9
VCC5: E1.1 JP4.1 RF2.1 V1.3
  other v1: 2051.11,3267.1 2086.11,3267.1 2051.11,3302.1 2086.11,3302.1 2051.11,3337.1 2086.11,3337.1
VCC5_from_bat: C1.2 C2.2 C3.2 D1.2 Q2.3 R1.2
  other v1: 2131.11,3017.1 2166.11,3017.1 2245,3020 1603.89,3022.9 1638.89,3022.9 2131.11,3052.1 2166.11,3052.1 2245,3055 1603.89,3057.9 1638.89,3057.9 1603.89,3092.9 1638.89,3092.9
VCC5_from_vcc12: C9.2 C10.2 C11.2 D3.2 L2.2 Q2.1 Q4.3 Q5.1 R5.2 R15.1 | length 1002.8
  Top Layer w10: v1(1795,1655) 1795,1693.54 R5.2
  Top Layer w20: Q2.1 2169.38,2946.88 2169.38,2910.62 2201.46,2878.54 2251.97,2878.54 2263.43,2890 2309.91,2890 2312.04,2892.13 2313.57,2892.13 v1@2314.65,2891.05 ; Q5.1 2312.6,2732.44 2335.14,2754.98 2363.67,2754.98 2420,2811.31 v1@2420,2850
  Bottom Layer w10: v1(1795,1655) 1760,1690 1760,2030 v1(1885,2155)
  other v1: 1733.89,2087.9 1768.89,2087.9 1733.89,2122.9 1768.89,2122.9 1733.89,2157.9 1768.89,2157.9 2388.89,2852.9 2423.89,2852.9 2313.89,2857.9 2393,2887.9 2423.89,2887.9 2313.89,2892.9
VCC12: C12.2 C13.2 C14.2 C17.2 C18.2 C19.2 C20.1 JP2.4 R13.1 R14.1 U2.7 U3.1 | length 297.7
  Top Layer w6: v1(1560,1535) R13.1 ; v1(1675,1505) 1675,1485 1683.54,1476.46 R14.1
  Top Layer w10: C17.2@1560,1645 1560,1690
  POWER w6: v1(1560,1535) 1561,1536 1581,1536 1590,1545 1590,1570 ; v1(1675,1505) 1675,1580
  other v1: 1450,1690 1485,1690 1520,1690 1450,1725 1485,1725 1520,1725 2265.44,1777.01 2301.69,1777.01 2337.94,1777.01 2374.19,1777.01 2410.44,1777.01 2265,1810 2301.25,1810 2337.5,1810 2373.75,1810 2410,1810
pads on no net: MR1.Mark MR2.Mark MR3.Mark MR4.Mark U1.6 U2.2 U2.3 U2.5 U2.10 U2.11 U4.3

## Polygon pours and split planes (outlines as drawn)
VCC5_from_bat on POWER "NONET_L-01_P-001" (solid, remove dead copper, pour order 39): 1585,3010 1665,3010 1665,3070 1680,3070 1690,3070 2105,3070 2120,3055 2120,3005 2255,3005 2255,3010 2255,3070 2190,3070 2130,3130 1585,3130
VCC5_from_vcc12 on POWER "NONET_L-01_P-001" (solid, remove dead copper, pour order 33): 1785,2075 1785,2175 2015,2405 2430,2405 2430,2910 2295,2910 2295,2494.92 1995,2500 1715,2220 1715,2075
VCC5 on POWER "POWER-VCC5" (solid, remove dead copper, pour order 50): 2030,3240 2100,3240 2100,3510 1840,3510 1840,3720 1735,3720 1735,3420 2030,3420
VCC12 on POWER "POWER-VCC12" (solid, remove dead copper, pour order 13): 1566.45,1560 2035,1560 2035,1610 1625,1610 1625,1740 1440,1740 1440,1675 1566.45,1675
VCC12 on POWER "NONET_L-01_P-001" (solid, remove dead copper, pour order 0): 2030,1610 2095,1610 2095,1820 2420,1820 2425,1820 2430,1820 2430,1690 2355,1690 2345,1690 2170,1690 2170,1485 2030,1485
GND on Top Layer "GND_L01_P060" (solid, remove dead copper, pour order 60): 1436.53,1395.17 ccw(c1566.45,1395.17) 1566.45,1265.25 2306.61,1265.25 ccw(c2306.61,1395.17) 2436.53,1395.17 2436.53,3595.96 ccw(c2306.61,3595.96) 2306.61,3725.88 1566.45,3725.88 ccw(c1566.45,3595.96) 1436.53,3595.96
GND on Top Layer "NONET_L-01_P-001" (solid, remove dead copper, pour order 26): 1504.77,2615 1506.78,2831.78 1680,2831.78 1680,2715 1535,2715 1535,2615
NetC7_1 on Top Layer "NONET_L-01_P-001" (solid, pour order 41): 1855,3160 1855,3255 1850,3260 1745,3260 1745,3380 1740,3380 1720,3380 1445,3380 1445,3470 1940,3470 1940,3385 1945,3385 2010,3385 2010,3260 1895,3260 1895,3160
BAT_IN on Top Layer "NONET_L-01_P-001" (solid, remove dead copper, pour order 58): 2070,2600 2140,2600 2140,2580 2230,2580 2230,2320 2150,2320 2150,2370 2180,2400 2180,2470 2095,2470 2095,2540 2060,2540 2060,2600
BAT+ on Top Layer "NONET_L-01_P-001" (solid, remove dead copper, pour order 59): 2030,2460 2030,2220 2110,2220 2110,2345 2080,2375 2080,2460
VCC5_from_vcc12 on Top Layer "NONET_L-01_P-001" (solid, remove dead copper, pour order 7): 2420,2035 2420,2165 1840,2165 1825,2180 1725,2180 1725,2070 1830,2070 1860,2100 1915,2100 1915,2085 1925,2085 1930,2085 2070,2085 2120,2035
VCC3_6 on Top Layer "NONET_L-01_P-001" (solid, pour order 18): 1580,2150 1580,2315 1640,2315 1640,2405 1720,2405 1720,2275 1655,2275 1655,2150
VCC3_6 on Top Layer "NONET_L-01_P-001" (solid, pour order 20): 1465,2600 1465,2525 1455,2525 1455,2455 1540,2455 1560,2475 1590,2475 1610,2455 1845,2455 1845,2545 1840,2545 1610,2545 1585,2520 1535,2520 1535,2600
VCC3_6 on Top Layer "Top Layer-VCC3_6" (solid, remove dead copper, pour order 29): 1720,2275 1730,2265 1730,2217.21 1855,2217.21 1855,2341.79 1725,2341.79 1725,2470 1650,2470 1650,2275
VCC3_3 on Top Layer "NONET_L-01_P-001" (solid, remove dead copper, pour order 51): 1450,3315 1450,3200 1520,3200 1520,3315
VCC5 on Top Layer "Top Layer-VCC5" (solid, remove dead copper, pour order 48): 1945,3080 2100,3080 2100,3350 2035,3350 2035,3245 1945,3245
NetQ2_2 on Top Layer "Top Layer-NetQ1_2" (solid, remove dead copper, pour order 45): 2230,2920 2355,2920 2355,3215 2280,3215 2280,3235 2190,3235 2190,3095 2275,3095 2275,2980 2230,2980
GND on Top Layer "NONET_L-01_P-001" (solid, pour order 42): 1545,3335 1595,3335 1595,3370 1600,3375 1650,3375 1650,3335 1665,3320 1735,3320 1735,3250 1740,3245 1805,3245 1805,3190 1545,3190
VCC5_from_vcc12 on Top Layer "NONET_L-01_P-001" (solid, remove dead copper, pour order 34): 2295,2905 2430,2905 2430,2840 2295,2840
VCC5_from_bat on Top Layer "NONET_L-01_P-001" (solid, remove dead copper, pour order 37): 2260,3000 2120,3000 2120,3065 2260,3065
VCC5_from_bat on Top Layer "NONET_L-01_P-001" (solid, remove dead copper, pour order 35): 1590,2995 1590,3105 1650,3105 1650,2995
NetD1_1 on Top Layer "Top Layer-NetD1_1" (solid, remove dead copper, pour order 32): 1625,2615 1840,2615 1840,2705 1770,2705 1770,2805 1695,2805 1695,2705 1600,2705 1590,2695 1545,2695 1545,2640 1600,2640
GND on Top Layer "NONET_L-01_P-001" (solid, pour order 27): 1540,3012.5 1540,2917.5 1440,2917.5 1440,3012.5
VCC5_from_bat on Top Layer "NONET_L-01_P-001" (solid, remove dead copper, pour order 24): 1462.78,2880 1462.98,2847.75 1646,2846 1695,2895 1765,2895 1765,2990 1660,2990 1650,3000 1590,3000 1590,2915 1555,2880
GND on Top Layer "NONET_L-01_P-001" (solid, pour order 23): 1440,1595 1535,1595 1535,1525 1440,1525
GND on Top Layer "NONET_L-01_P-001" (solid, remove dead copper, pour order 22): 1553.29,2456.08 1553.06,2455.85 1553.06,2440 1445,2440 1445,2345 1540,2345 1550,2335 1615,2335 1615,2390 1630,2405 1630,2445 1597.32,2445 1586.62,2455.69
NetL3_1 on Top Layer "NONET_L-01_P-001" (solid, remove dead copper, pour order 16): 1610,1805 1595,1820 1595,1870 1465,1870 1455,1880 1455,1970 1680,1970 1675,1965 1675,1880 1665,1880 1625,1840 1625,1805
NetL3_2 on Top Layer "NONET_L-01_P-001" (solid, remove dead copper, pour order 17): 1675,2040 1675,2125 1535,2125 1535,2315 1455,2315 1455,2040
GND on Top Layer "NONET_L-01_P-001" (solid, remove dead copper, pour order 14): 1460,1820 1510,1820 1510,1810.6 1538.5,1782.1 1537.92,1781.52 1537.92,1753.53 1581.47,1753.53 1600,1735 1610,1735 1610,1795 1575,1795 1575,1855 1460,1855
VCC12 on Top Layer "Top Layer-VCC12" (solid, remove dead copper, pour order 11): 1595,1680 1605,1690 1620,1690 1620,1725 1590,1725 1575,1740 1525,1740 1525,1765 1510,1780 1440,1780 1440,1630 1530,1630 1530,1680
GND on Top Layer "NONET_L-01_P-001" (solid, remove dead copper, pour order 6): 1790,2035 1840,2035 1840,2047.47 1868.87,2076.33 1903.67,2076.33 1927.77,2052.23 1927.77,2032.2 2087.8,2032.2 2090,2030 2085,2025 2085,1960 1995,1960 1995,1935 1995,1880 1995,1850 2077.29,1850 2077.29,1645 1980,1645 1980,1795 1920,1855 1830,1855 1830,1950 1805,1975 1790,1975
NetC8_2 on Top Layer "NONET_L-01_P-001" (solid, remove dead copper, pour order 5): 2220,1775 2221.59,1776.59 2221.59,1838.32 2418.32,1838.32 2420,1840 2420,1960 2115,1960 2085,1930 2010,1930 2010,1860 2095,1860 2095,1775
GND on Top Layer "NONET_L-01_P-001" (solid, remove dead copper, pour order 4): 2096.23,1700 2185,1700 2205,1700 2227.64,1700 2227.64,1677.36 2255,1650 2420,1650 2420,1510 2410,1510 2180,1510 2180,1665 2096.23,1665
VCC12 on Top Layer "Top Layer-VCC12 1" (solid, remove dead copper, pour order 3): 2245,1700 2430,1700 2430,1823.57 2245,1823.57 2245,1775 2230,1760 2095,1760 2095,1725 2222.5,1725 2245,1702.5
GND on GND "GND_L02_P052" (solid, remove dead copper, pour order 52): 1436.53,1395.17 ccw(c1566.45,1395.17) 1566.45,1265.25 2306.61,1265.25 ccw(c2306.61,1395.17) 2436.53,1395.17 2436.53,3595.96 ccw(c2306.61,3595.96) 2306.61,3725.88 1566.45,3725.88 ccw(c1566.45,3595.96) 1436.53,3595.96
GND on Bottom Layer "GND_L04_P054" (solid, remove dead copper, pour order 54): 1436.53,1395.17 ccw(c1566.45,1395.17) 1566.45,1265.25 2306.61,1265.25 ccw(c2306.61,1395.17) 2436.53,1395.17 2436.53,3595.96 ccw(c2306.61,3595.96) 2306.61,3725.88 1566.45,3725.88 ccw(c1566.45,3595.96) 1436.53,3595.96

## Other copper
Top Layer:
  pour cut-out: 1850,2565 2015,2565 2015,2210 2120,2210 2120,2380 2140,2380 2140,2170 1845,2170 1825,2190 1660,2190 1660,2265 1725,2265 1725,2210 1860,2210 1860,2350 1855,2345 1730,2345 1730,2445 1850,2445

## Silkscreen, mask and mechanical layers (free items; w line width, h text height)
Top Overlay:
  text "3.3v" at 2150,3635.67 h60
  text "5V" at 1750,3570.67 h60
  text "BAT+" at 2300,3570 h60 r270
  text "GND" at 1875,3465.67 h60
  text "RX" at 2010,3465 h60
  text "TX" at 2105,3460 h60
  text "GND" at 2320,3165.67 h60
  text "GND" at 1695,2970.67 h60
  text "SCL" at 1935,2915.67 h60
  text "SDA" at 2030,2915.67 h60
  text "RX" at 1965,1555 h60
  text "TX" at 1885,1550 h60
  text "12V" at 2060,1545 h60
  text "GND" at 1789.45,1455 h60 r90
Bottom Solder:
  rectangle: 1750,3255 2010,3370
  rectangle: 1465,2550 1575,2685
  rectangle: 1600,1730 1705,1795
  rectangle: 1965,1610 2095,1805
Mechanical 1:
  the board outline again, w0.5
Mechanical 6:
  lines w6: 1903.28,3502 2009.28,3502 ; 2033.28,3502 2139.28,3502
  lines w7.87: 1441.28,2550 1441.28,2950 1541.28,2950 1541.28,2550 1441.28,2550 ; 1441.28,2960 1741.28,2960 1741.28,3060 1441.28,3060 1441.28,2960 ; 1736.28,3620 2136.28,3620 2136.28,3720 1736.28,3720 1736.28,3620 ; 1816.28,2960 2116.28,2960 2116.28,3060 1816.28,3060 1816.28,2960 ; 1881.28,3510 2181.28,3510 2181.28,3610 1881.28,3610 1881.28,3510 ; 2326.28,3215 2426.28,3215 2426.28,3415 2326.28,3415 2326.28,3215
  lines w8: 1875.28,3516 1875.28,3604